# EAGLE board bezkontaktowy miernik odległości (EAGLE 9.7.0)
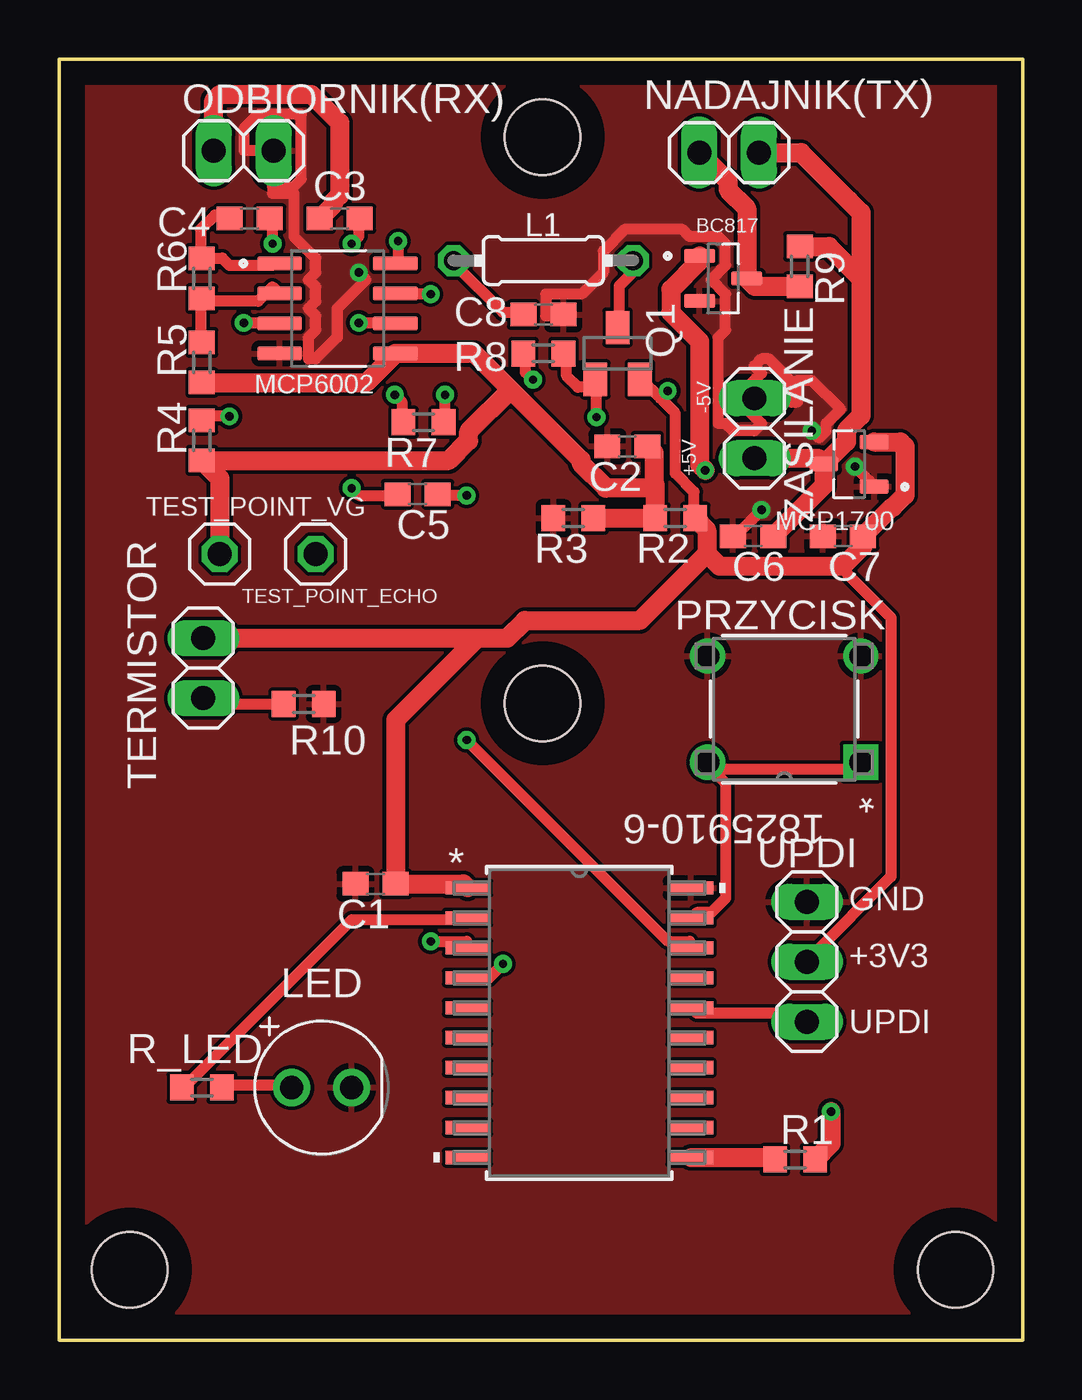
[diagram p0: board, top side]
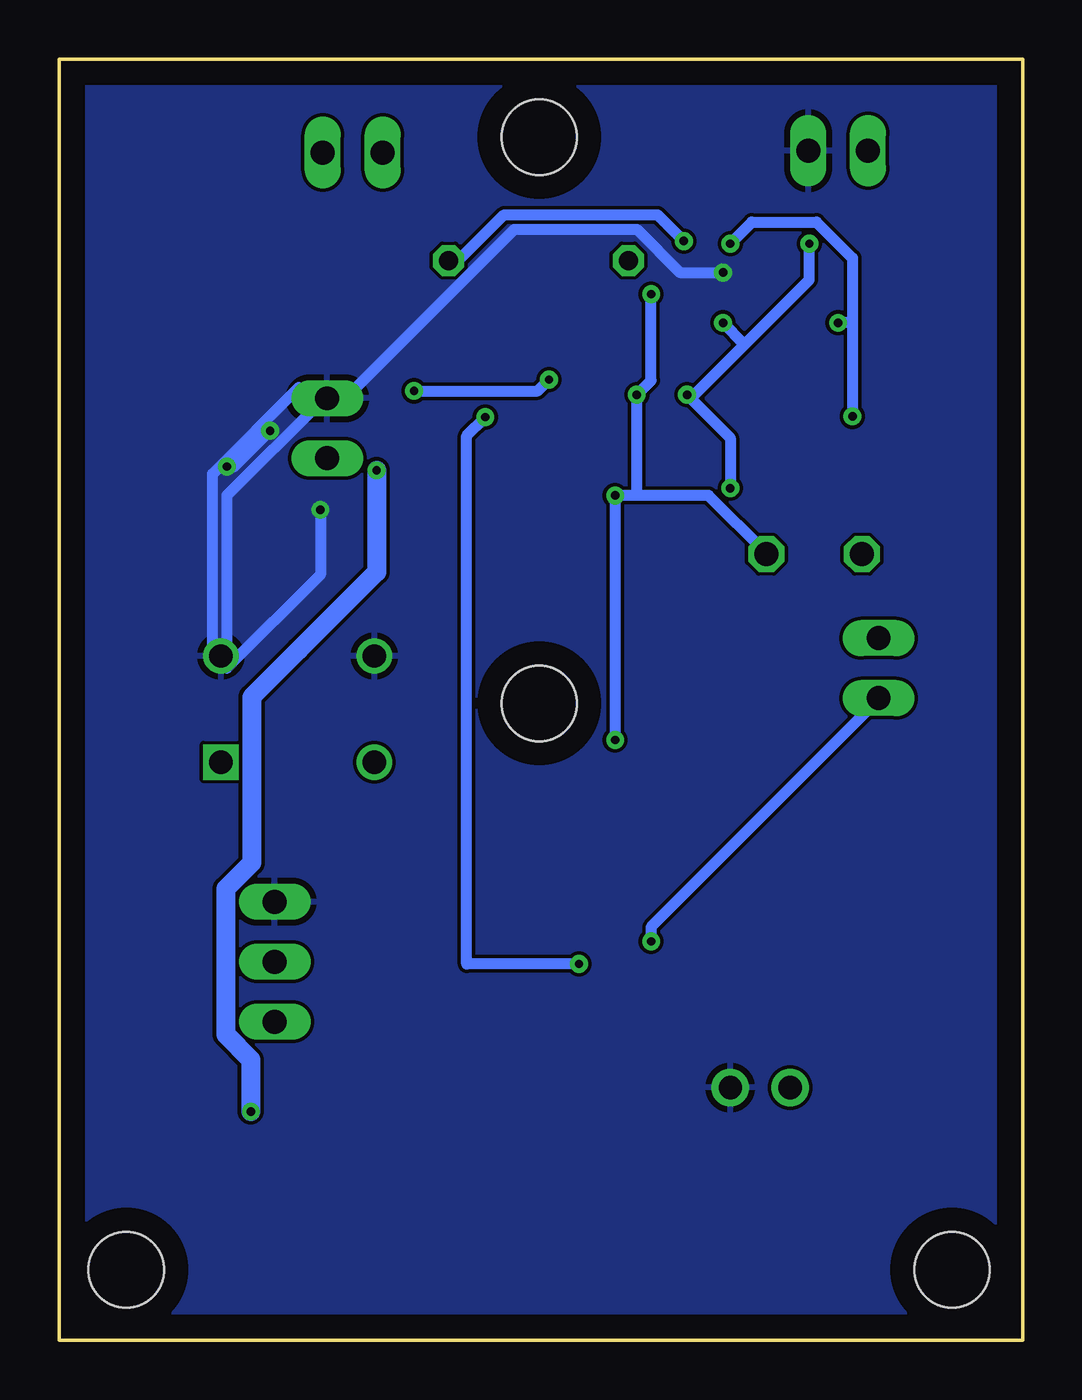
[diagram p1: board, bottom side, seen from below]

Size 40.86 x 54.31 mm. Coordinates in mm from the lower left corner, seen from the top.
Outline: 18.5,54.31 40.86,54.31 40.86,0 0,0 0,54.31 18.5,54.31
Copper layers (1*16): Top 0.035mm / dielectric 1.5mm / Bottom 0.035mm
Design rules "Fusion Electronics Design Rules": minimum track width 12mil, minimum drill 0.35mm, track to track 6mil, track to pad 6mil, pad to pad 6mil, via to via 6mil, smd to smd 6mil, copper to edge 40mil, drill to drill 6mil, minimum pad ring 10mil, minimum via ring 8mil, stop-mask expansion 4mil, vias tented up to drill 9999mil, thermal gap 10mil
Holes 3.2 mm at 3,3 38,3 20.5,51 20.5,27

## Footprints (pad centres in the part's own frame; a part is rotated, then mirrored left to right if it is on the bottom)
SOIC20_300MIL_MCH = smd 1.88 x 0.559: 1 -4.737,5.715; 2 -4.737,4.445; 3 -4.737,3.175; 4 -4.737,1.905; 5 -4.737,0.635; 6 -4.737,-0.635; 7 -4.737,-1.905; 8 -4.737,-3.175; 9 -4.737,-4.445; 10 -4.737,-5.715; 11 4.737,-5.715; 12 4.737,-4.445; 13 4.737,-3.175; 14 4.737,-1.905; 15 4.737,-0.635; 16 4.737,0.635; 17 4.737,1.905; 18 4.737,3.175; 19 4.737,4.445; 20 4.737,5.715
SOT95P240X120-3N = smd 1.32 x 0.6: 1 -1,0.95; 2 -1,-0.95; 3 1,0
C0603 = smd 1.1 x 1: 1 -0.85,0; 2 0.85,0
0204/7 = drill 0.813 octagon: 1 -3.81,0; 2 3.81,0
LEDRD254W60D565H860B_R = drill 0.981 pad 1.581: A -1.27,0; C 1.27,0
SOT95P237X112-3N = smd 1.22 x 0.62: 1 -1.065,0.95; 2 -1.065,-0.95; 3 1.065,0
SOIC127P600X175-8N = smd 1.9 x 0.6: 1 -2.455,1.905; 2 -2.455,0.635; 3 -2.455,-0.635; 4 -2.455,-1.905; 5 2.455,-1.905; 6 2.455,-0.635; 7 2.455,0.635; 8 2.455,1.905
1X02 = drill 1.016 long: 1 -1.27,0; 2 1.27,0
SW4_1825910-B = drill 0.991 pad 1.499 square: 1 -6.502,4.496 | drill 0.991 pad 1.499: 2 0,4.496; 3 -6.502,0; 4 0,0
SOT23 = smd 1 x 1.4: 1 -0.95,-1.1; 2 0.95,-1.1; 3 0,1.1
R0603 = smd 1 x 1.1: 1 -0.85,0; 2 0.85,0
1X01 = drill 1.016 octagon: 1 0,0
1X03 = drill 1.016 long: 1 -2.54,0; 2 0,0; 3 2.54,0

## Placement (x,y rotation side)
ATTINY1616-SN  ATTINY1616-SNSOIC20_300MIL_MCH  [SOIC20_300MIL_MCH]  22.06,13.47 0 top
BC817  BC817-40  [SOT95P240X120-3N]  28.15,45.01 0 top
C1  100nF  [C0603]  13.42,19.36 180 top
C2  1 µF  [C0603]  24.09,37.9 180 top
C3  10nF  [C0603]  11.9,47.55 180 top
C4  47 pF  [C0603]  8.09,47.55 180 top
C5  33 pF  [C0603]  15.2,35.87 0 top
C6  1uF  [C0603]  29.42,34.09 0 top
C7  1uF  [C0603]  33.23,34.09 0 top
C8  100nF  [C0603]  20.53,43.49 180 top
L1  10uH  [0204/7]  20.53,45.77 180 top
LED  LED_RADIALRED  [LEDRD254W60D565H860B_R]  11.13,10.72 0 top
MCP1700  MCP1700T-3302E_TT  [SOT95P237X112-3N]  33.49,37.14 180 top
MCP6002  MCP6002-I/SN  [SOIC127P600X175-8N]  11.81,43.74 0 top
NADAJNIK(TX)  PINHD-1X02_1X02M  [1X02]  28.41,50.34 0 top
ODBIORNIK(RX)  PINHD-1X02_1X02M  [1X02]  7.83,50.43 0 top
PRZYCISK  1825910-6  [SW4_1825910-B]  27.49,29.01 180 top
Q1  PMOSFET_BSS84_SOT23-GSD  [SOT23]  23.68,41.84 0 top
R1  1kΩ  [R0603]  31.2,7.67 0 top
R2  100kΩ  [R0603]  26.12,34.85 180 top
R3  470 kΩ  [R0603]  21.8,34.85 180 top
R4  1MΩ  [R0603]  6.05,38.15 90 top
R5  10kΩ  [R0603]  6.05,41.45 90 top
R6  470kΩ  [R0603]  6.05,45.01 90 top
R7  47kΩ  [R0603]  15.45,38.91 180 top
R8  100kΩ  [R0603]  20.53,41.84 0 top
R9  4.7 kΩ  [R0603]  31.4,45.52 270 top
R10  10kΩ  [R0603]  10.37,26.98 180 top
R_LED  1kΩ  [R0603]  6.05,10.72 0 top
TERMISTOR  PINHD-1X02_1X02M  [1X02]  6.12,28.5 270 top
TEST_POINT_ECHO  PINHD-1X1  [1X01]  10.88,33.33 0 top
TEST_POINT_VG  PINHD-1X1  [1X01]  6.82,33.33 0 top
UPDI  PINHD-1X03_1X03M  [1X03]  31.71,16.05 270 top
ZASILANIE  PINHD-1X02_1X02M  [1X02]  29.48,38.66 90 top

## Library data of the parts
ATTINY1616-SN = ATTINY1616-SN; COPYRIGHT: Copyright (C) 2025 Ultra Librarian. All rights reserved.; MANUFACTURER_NAME: Microchip; MANUFACTURER_PART_NUMBER: ATTINY1616-SN
BC817 = SnapEDA Library; MANUFACTURER: Diotec Semiconductor; MAXIMUM_PACKAGE_HEIGHT: 1.2mm; PARTREV: 2023-08-16; STANDARD: IPC 7351B
C1-C8 = rcl; SPICEPREFIX: C
L1 = rcl; SPICEPREFIX: L
LED = Opto-Electronic; CATEGORY: Optoelectronics; COLOR: Red; DESCRIPTION: Radial LED (Round) 2.54 mm pitch 5.65 mm body diameter 8.60 mm body height Red; PACKAGE_SIZE: 5mm; PACKAGE_TYPE: Through Hole; SUBCATEGORY: LED; TYPE: Round
MCP1700 = SnapEDA Library; MANUFACTURER: Microchip; MAXIMUM_PACKAGE_HEIGHT: 1.12 mm; PARTREV: E; SNAPEDA_PACKAGE_ID: 22705; SNAPEDA_PN: MCP1700T-3302E/TT; STANDARD: IPC 7351B
MCP6002 = SnapEDA Library; MANUFACTURER: Microchip; MAXIMUM_PACKAGE_HEIGHT: 1.75 mm; PARTREV: L; SNAPEDA_PN: MCP6002T-I/SN; STANDARD: IPC-7351B
NADAJNIK(TX) ODBIORNIK(RX) TERMISTOR UPDI ZASILANIE = Tinkercad
PRZYCISK = Switches; BUILT_BY: EMA_UL_Team; CATEGORY: Tactile Switches; CONFIGURATION__POLE-THROW_: Single Pole - Single Throw; COPYRIGHT: Copyright (C) 2016 Accelerated Designs. All rights reserved; DESCRIPTION: FSM4JH=6MM TACT SWITCH, HIGH TEMP; MANUFACTURER_PART_NUMBER: 1825910-6; MAX_SWITCHING_CURRENT: -; MAX_SWITCHING_VOLTAGE_AC_: -; PART_STATUS: active; PRODUCT_TYPE: Switch; SERIES: ?Alcoswitch FSM; SWITCH_TYPE: Tactile Switches; TE_PART_NUMBER: 1825910-6; VENDOR: TE Connectivity
Q1 = Transistor; CATEGORY: Transistor; DATASHEET: https://www.onsemi.com/download/data-sheet/pdf/bss84-d.pdf; DESCRIPTION: P-Channel 50 V 130 mA (Ta) 225 mW (Ta) Surface Mount SOT-23-3 (TO-236); DRAIN_CURRENT: 130 mA; IC_MAX: NA; MANUFACTURER: onsemi; MPN: BSS84; OPERATING_TEMPERATURE: -55°C ~ 150°C; PACKAGE_SIZE: SOT23; PACKAGE_TYPE: Surface Mount; PART_STATUS: Active; ROHS: Compliant; SERIES: BSS84; SUBCATEGORY: MOSFET; THERMALLOSS: 0.36 W; TYPE: P-Channel; VCEO_MAX: NA
R1-R10 R_LED = rcl; SPICEPREFIX: R
TEST_POINT_ECHO TEST_POINT_VG = Connector; CATEGORY: Connectors; DESCRIPTION: Header-Straight-1 Position; PACKAGE_TYPE: Through Hole; PITCH: 0.100" (2.54mm); SUBCATEGORY: Headers; TYPE: Male Pins

## Nets
1_NADAJNIK: BC817.3 NADAJNIK(TX).1 R9.2
1_ODBIORNIK: C3.2 ODBIORNIK(RX).1
+3V3: ATTINY1616-SN.1 C1.1 C7.2 MCP1700.2 Q1.2 R2.1 R8.1 TERMISTOR.1 UPDI.2
+5V: C6.2 MCP1700.3 NADAJNIK(TX).2 R9.1 ZASILANIE.1
BAZA: BC817.1 R1.2
BTN: ATTINY1616-SN.19 PRZYCISK.1 PRZYCISK.2
ECHO: ATTINY1616-SN.18 C5.2 MCP6002.7 R7.1 TEST_POINT_ECHO.1
GATE: ATTINY1616-SN.4 Q1.1 R8.2
GND: ATTINY1616-SN.20 BC817.2 C1.2 C2.2 C6.1 C7.1 C8.1 LED.C MCP1700.1 MCP6002.4 ODBIORNIK(RX).2 PRZYCISK.3 PRZYCISK.4 R3.2 R10.1 UPDI.1 ZASILANIE.2
LED: ATTINY1616-SN.2 R_LED.1
N$1: C3.1 MCP6002.3 R4.2
N$2: MCP6002.2 R5.2 R6.1
N$3: C4.2 MCP6002.1 R6.2
N$4: LED.A R_LED.2
N$5: C4.1 C5.1 MCP6002.6 R7.2
N$6: C8.2 L1.2
N$8: ATTINY1616-SN.11 R1.1
TEMP: ATTINY1616-SN.3 R10.2 TERMISTOR.2
UPDI: ATTINY1616-SN.16 UPDI.3
VDD_AMP: L1.1 MCP6002.8 Q1.3
VG: C2.1 MCP6002.5 R2.2 R3.1 R4.1 R5.1 TEST_POINT_VG.1

## Tracks (layer width: path | path; a pad name or v marks a point on that pad's centre or on a via)
1_NADAJNIK
  Top 0.813: NADAJNIK(TX).1 28.36,49.12 28.36,48.78 29.15,47.98 BC817.3 29.49,44.67 R9.2
1_ODBIORNIK
  Top 0.813: ODBIORNIK(RX).1 6.56,52.56 6.82,52.81 10.7,52.81 11.9,51.61 11.9,48.54 11.64,48.28 11.64,48.14 C3.2
+3V3  (via drill 0.35)
  Top 0.457: UPDI.2 31.91,16.31 35.26,19.66 35.26,30.63 33.44,32.46 33.23,32.82 | 25.48,39.93 26.12,39.3 26.12,36.76 26.91,35.96 26.91,35.17 R2.1 | 25.48,39.93 24.69,40.72 Q1.2 | v20.09,40.72 19.77,41.04 19.77,41.84 R8.1 | v25.8,40.25 25.64,40.09 25.48,39.93
  Top 0.813: MCP1700.2 35.67,38.09 35.86,37.9 35.86,35.83 35.35,35.32 35.31,35.32 C7.2 34.08,33.67 33.23,32.82 28,32.82 27.46,33.36 | R2.1 27.46,34.36 27.46,33.36 | ATTINY1616-SN.1 17.15,19.36 C1.1 14.27,26.3 17.74,29.77 | TERMISTOR.1 17.74,29.77 | 17.74,29.77 19,29.77 19.75,30.52 24.63,30.52 27.46,33.36
  Bottom 0.457: v20.09,40.72 20.56,40.25 v25.8,40.25
+5V
  Top 0.813: ZASILANIE.1 32.17,37.39 MCP1700.3 | MCP1700.3 32.42,36.24 C6.2 | R9.1 32.64,46.37 33.99,45.01 | MCP1700.3 33.38,38.1 33.38,38.58 33.99,39.19 33.99,45.01 | NADAJNIK(TX).2 31.45,50.34 33.49,48.31 33.99,47.8 33.99,45.01
BAZA  (via drill 0.35)
  Top 0.813: v27.39,36.88 27.15,37.12 27.15,42.35 25.93,43.57 25.93,44.55 27.15,45.77 BC817.1 | v32.72,9.7 32.72,8.35 R1.2
  Bottom 0.813: v27.39,36.88 27.39,32.56 30.69,29.26 32.68,27.27 32.68,20.25 33.79,19.14 33.79,12.97 32.72,11.9 v32.72,9.7
BTN
  Top 0.457: ATTINY1616-SN.19 27.03,18.14 27.64,18.14 28.25,18.75 28.25,23.62 27.64,24.23 PRZYCISK.2 27.95,24.23 33.74,24.23 PRZYCISK.1
ECHO  (via drill 0.35)
  Top 0.457: v17.28,35.81 16.06,35.81 C5.2 | v16.37,40.08 16.37,39.17 R7.1 | v17.28,25.45 25.82,16.92 26.73,16.92 ATTINY1616-SN.18 | v15.76,44.35 14.54,44.35 MCP6002.7
  Bottom 0.457: 16.37,35.81 13.32,35.81 10.88,33.38 TEST_POINT_ECHO.1 | 16.37,35.81 v17.28,35.81 v17.28,25.45 | 16.37,35.81 v16.37,40.08 15.76,40.69 v15.76,44.35
GATE  (via drill 0.35)
  Top 0.457: v22.79,39.14 22.79,40.72 Q1.1 22.63,40.41 21.99,40.41 21.52,40.88 21.52,41.84 R8.2 | v18.82,15.96 18.18,15.32 17.39,15.32 ATTINY1616-SN.4
  Bottom 0.457: v22.79,39.14 23.58,38.34 23.58,15.96 v18.82,15.96
GND  (via drill 0.35)
  Top 0.457: v31.91,38.56 32.22,38.25 32.52,38.56 32.52,38.86 33.13,39.47 31.91,40.69 31.3,40.69 31,40.39 31,39.78 31.3,39.78 31.3,40.39 30.08,41.61 29.78,41.61 29.47,41.3 29.78,41 29.17,40.39 29.17,39.47 29.78,38.86 29.47,38.56 28.56,38.56 28.25,38.86 27.95,38.86 27.95,42.52 28.25,42.83 28.25,44.35 27.64,44.96 28.25,45.57 28.25,46.48 27.95,46.79 26.73,46.79 26.43,47.09 23.99,47.09 23.07,46.18 23.07,45.26 22.16,44.35 20.63,44.35 20.63,43.44 21.24,43.44 C8.1 | v33.74,37.03 34.35,36.42 MCP1700.1 | v12.71,45.26 13.01,44.96 11.79,43.74 11.79,42.52 10.88,41.61 10.57,41.61 10.57,42.52 10.88,42.83 10.88,43.44 10.57,43.74 10.88,44.05 10.88,44.65 10.57,44.96 10.88,45.26 10.88,45.87 9.97,46.79 9.97,48.62 9.66,48.92 9.05,48.92 9.05,48.62 9.66,48.62 10.27,49.23 10.27,51.97 8.44,51.97 7.83,51.36 7.83,50.45 9.05,50.45 ODBIORNIK(RX).2 | v29.78,35.21 28.86,34.29 C6.1
  Bottom 0.457: PRZYCISK.3 33.74,29.11 33.74,35.81 29.78,39.78 ZASILANIE.2 | v31.91,38.56 33.44,37.03 v33.74,37.03 | v12.71,45.26 14.54,45.26 16.37,47.09 21.55,47.09 28.25,40.39 30.69,40.39 34.35,36.73 34.35,28.8 34.05,28.5 33.74,28.5 29.78,32.46 v29.78,35.21
  pour Top: 0.09,-0.07 40.72,-0.07 40.72,54.33 0.09,54.33
  pour Bottom: 0.09,-0.07 40.72,-0.07 40.72,54.33 0.09,54.33
LED
  Top 0.457: R_LED.1 5.39,10.82 12.4,17.83 17.28,17.83 ATTINY1616-SN.2
N$1  (via drill 0.35)
  Top 0.457: v7.22,39.17 6.31,39.17 R4.2 | v12.4,46.48 12.71,46.79 12.71,47.4 C3.1 | v7.83,43.13 9.05,43.13 MCP6002.3
  Bottom 0.457: 7.22,43.13 7.22,45.87 8.75,47.4 11.49,47.4 v12.4,46.48 | 7.22,43.13 v7.22,39.17 | 7.22,43.13 v7.83,43.13
N$2
  Top 0.457: R5.2 6,42.52 6,44.05 R6.1 6.31,44.05 8.44,44.05 9.05,44.65 MCP6002.2
N$3
  Top 0.457: C4.2 7.22,47.7 6.61,47.7 6,47.09 6,45.87 R6.2 6.31,45.87 6.92,45.87 7.22,45.57 9.05,45.57 MCP6002.1
N$4
  Top 0.457: R_LED.2 6.92,10.82 9.66,10.82 LED.A
N$5  (via drill 0.35)
  Top 0.457: v12.4,36.12 12.71,35.81 14.23,35.81 C5.1 | v14.23,40.08 14.54,39.78 14.54,39.17 R7.2 | v9.05,46.48 9.05,47.4 C4.1 | v12.71,43.13 14.23,43.13 MCP6002.6
  Bottom 0.457: v12.4,36.12 12.4,38.25 v14.23,40.08 13.93,40.08 11.79,42.22 | v9.05,46.48 9.05,44.96 11.79,42.22 | 11.79,42.22 v12.71,43.13
N$6
  Top 0.457: C8.2 19.61,43.58 18.82,43.58 16.75,45.64 L1.2
N$8
  Top 0.813: ATTINY1616-SN.11 30.27,7.75 R1.1
TEMP  (via drill 0.35)
  Top 0.457: R10.2 9.36,26.98 6.31,26.98 TERMISTOR.2 | v15.76,16.92 17.28,16.92 ATTINY1616-SN.3
  Bottom 0.457: v15.76,16.92 15.76,17.53 6.31,26.98 TERMISTOR.2
UPDI
  Top 0.457: ATTINY1616-SN.16 27.03,13.87 31.3,13.87 31.61,13.56 UPDI.3
VDD_AMP  (via drill 0.35)
  Top 0.457: Q1.3 23.74,42.95 23.74,44.69 24.37,45.33 24.37,45.64 L1.1 | v14.37,46.6 14.37,45.64 MCP6002.8
  Bottom 0.457: v14.37,46.6 15.48,47.71 21.99,47.71 23.9,45.8 24.21,45.8 L1.1
VG
  Top 0.813: 25.27,36.12 R2.2 R3.1 | 19.14,40.31 22.13,37.32 22.13,37.17 23.18,36.12 25.27,36.12 | 19.14,40.31 17.74,41.71 17.61,41.84 MCP6002.5 13.03,40.6 R5.1 | TEST_POINT_VG.1 6.82,36.54 R4.1 16.53,37.3 17.36,38.13 17.36,38.54 19.14,40.31 | C2.1 25.22,37.61 25.22,36.32 25.27,36.27 25.27,36.12

## Text on the board
tNames: -5V | +5V | GND | +3V3 | UPDI